# Altium PCB finger.PcbDoc
Units mm, origin at the board's own origin, x right, y up, seen from the top; angles counter-clockwise.
Board outline 21 x 34 mm, 2 copper layers (Top Layer, Bottom Layer); 35 components, 38 nets, 238 pads, 92 vias.
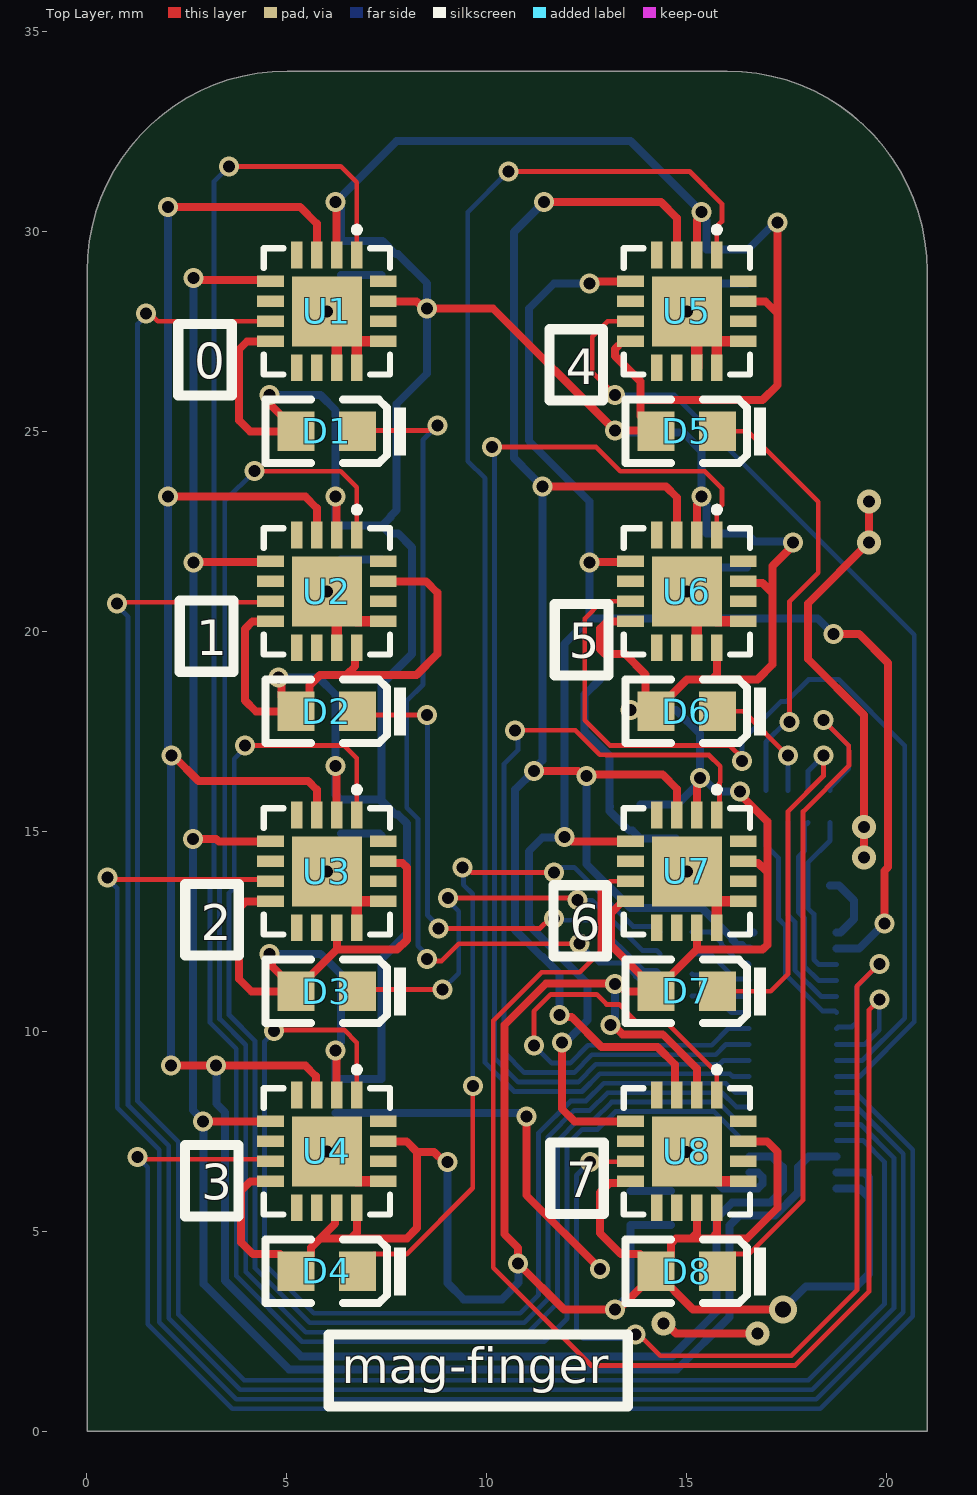
[diagram p0: Top Layer view]
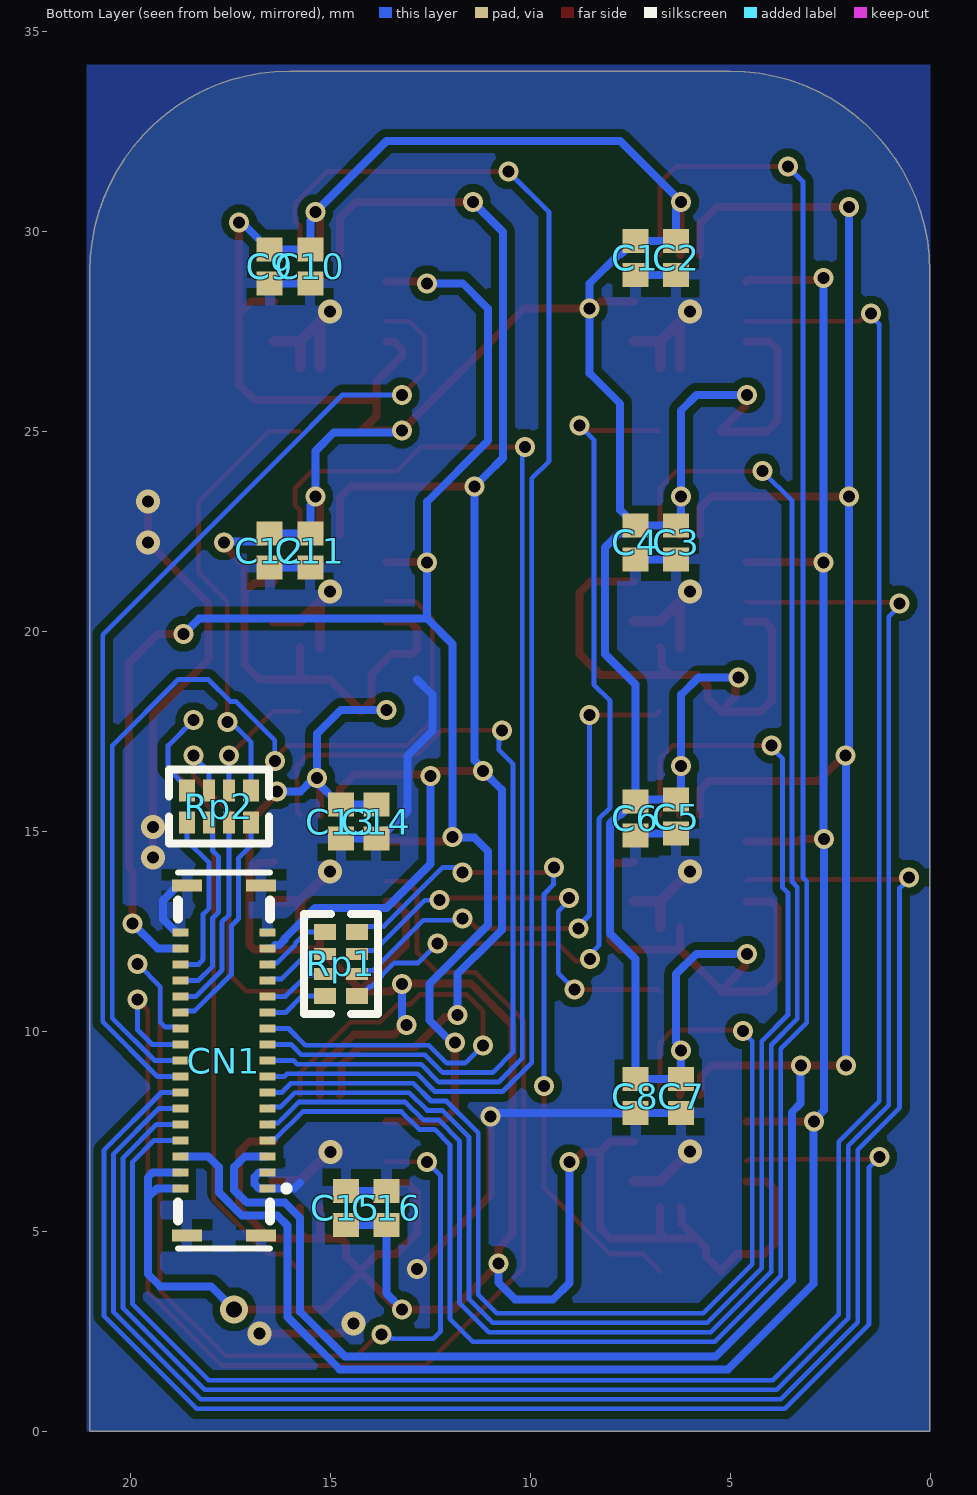
[diagram p1: Bottom Layer view, seen from below]
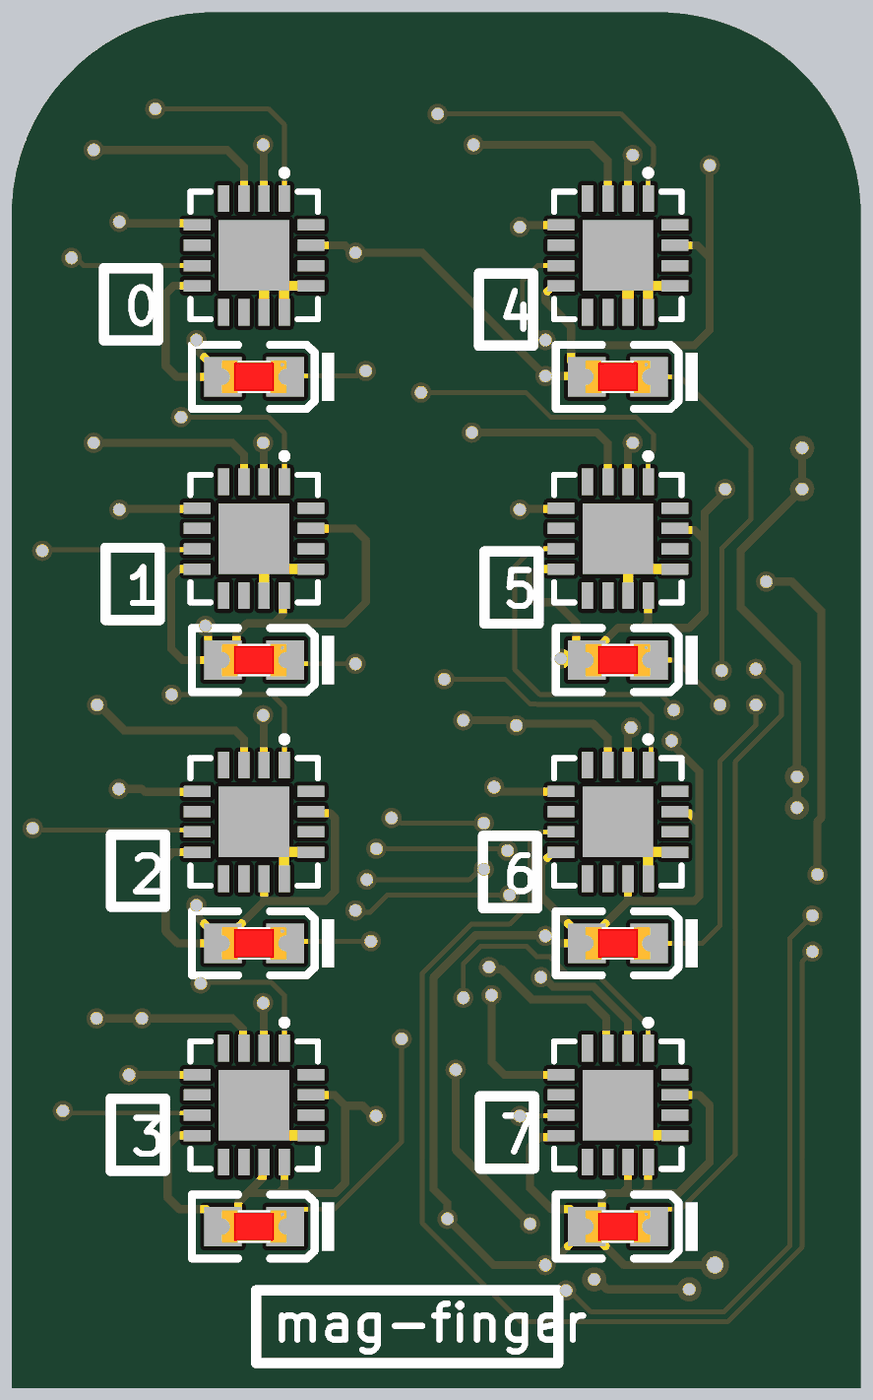
[diagram p2: 3D render of the assembled board from above, using the file's embedded part models]
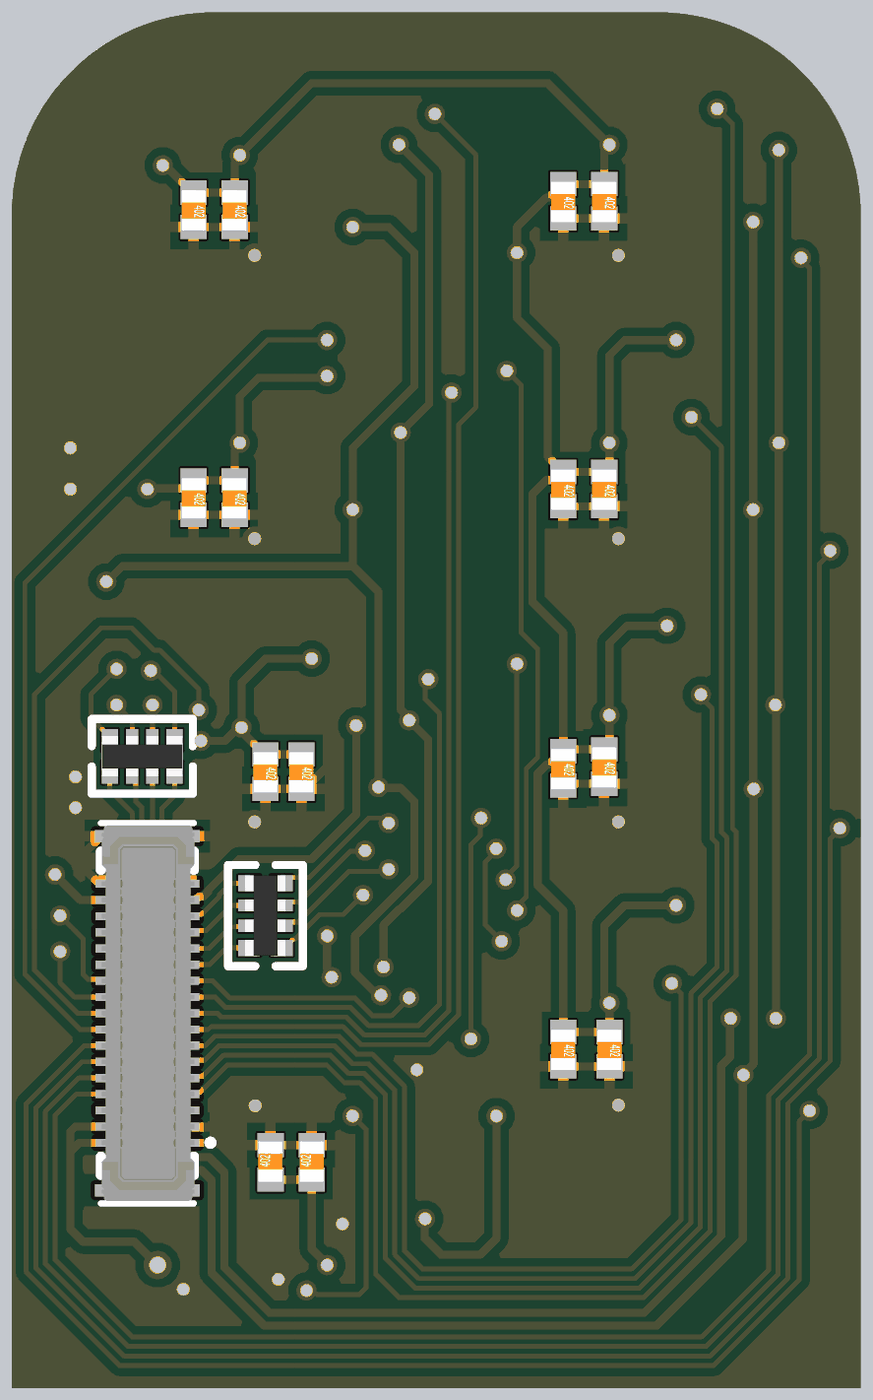
[diagram p3: 3D render of the assembled board from below, using the file's embedded part models]

## Layer stack, top to bottom
Top Solder: solder mask 0.0102, Solder Resist, Dk 3.5
Top Layer: signal copper 0.0356
Dielectric 1: dielectric 0.32, FR-4, Dk 4.8
Bottom Layer: signal copper 0.0356
Bottom Solder: solder mask 0.0102, Solder Resist, Dk 3.5

## Board outline
0.006,0.006 0.006,29.006 cw(c5.006,29.006) 5.006,34.006 16.006,34.006 cw(c16.006,29.006) 21.006,29.006 21.006,0.006

## Design rules (kind name [scope] priority, off if disabled: settings)
Clearance [All] p1: gap=0.2 ignorepadtopadclearanceinfootprint=TRUE except(0.117: Arc-Arc Arc-Track Arc-SMDPad Arc-THPad Arc-Text Arc-Hole Track-Track Track-SMDPad Track-THPad Track-Text Track-Hole SMDPad-SMDPad SMDPad-THPad SMDPad-Text SMDPad-Hole THPad-THPad THPad-Text THPad-Hole Fill-Text Fill-Hole Poly-Text Poly-Hole Region-Text Region-Hole Text-Text Text-Hole)
HoleSize [All] p1: absolutevalues=TRUE maxlimit=5 minlimit=0.025 maxpercent=80.000 minpercent=20.000
MinimumSolderMaskSliver [All] p1: minsoldermaskwidth=0
PolygonConnect [All] p1: thpad.connectstyle=Relief thpad.reliefconductorwidth=0.254 thpad.reliefentries=4 thpad.polygonreliefangle="90 Angle" thpad.airgapwidth=0.254 smdpad.connectstyle=Relief smdpad.reliefconductorwidth=0.254 smdpad.reliefentries=4 smdpad.polygonreliefangle="90 Angle" smdpad.airgapwidth=0.254 via.connectstyle=Direct via.reliefconductorwidth=0.254 via.reliefentries=4 via.polygonreliefangle="90 Angle" via.airgapwidth=0.254
RoutingVias [All] p1: holewidth=0.3 width=0.6 viastyle="Through Hole" minholewidth=0.3 minwidth=0.45 maxholewidth=0.3 maxwidth=0.5
SilkToSilkClearance [All] p1: silktosilkclearance=0
SilkToSolderMaskClearance [IsPad] p1: minsilkscreentomaskgap=0 clearancetoexposedcopper=TRUE
SolderMaskExpansion [All] p1: expansion=0.102 istentingtop=FALSE
Width [All] p1: maxlimit=0.5 minlimit=0.102 preferedwidth=0.2
26 further rules are at their usual default settings.

## Components (designator, comment, footprint, x,y, rotation, side; value= is the part's Value field where it differs from the comment)
C1 "100nF (104) 10% 16V" LC-0402_C_NOSILK 7.366,29.337 r270 bottom
C2 "100nF (104) 10% 16V" LC-0402_C_NOSILK 6.35,29.337 r270 bottom
C3 "100nF (104) 10% 16V" LC-0402_C_NOSILK 6.35,22.225 r270 bottom
C4 "100nF (104) 10% 16V" LC-0402_C_NOSILK 7.366,22.225 r270 bottom
C5 "100nF (104) 10% 16V" LC-0402_C_NOSILK 6.35,15.367 r270 bottom
C6 "100nF (104) 10% 16V" LC-0402_C_NOSILK 7.366,15.323 r270 bottom
C7 "100nF (104) 10% 16V" LC-0402_C_NOSILK 6.223,8.382 r270 bottom
C8 "100nF (104) 10% 16V" LC-0402_C_NOSILK 7.366,8.382 r270 bottom
C9 "100nF (104) 10% 16V" LC-0402_C_NOSILK 16.51,29.127 r270 bottom
C10 "100nF (104) 10% 16V" LC-0402_C_NOSILK 15.494,29.127 r270 bottom
C11 "100nF (104) 10% 16V" LC-0402_C_NOSILK 15.494,22.015 r270 bottom
C12 "100nF (104) 10% 16V" LC-0402_C_NOSILK 16.51,22.015 r270 bottom
C13 "100nF (104) 10% 16V" LC-0402_C_NOSILK 14.732,15.24 r270 bottom
C14 "100nF (104) 10% 16V" LC-0402_C_NOSILK 13.843,15.24 r270 bottom
C15 "100nF (104) 10% 16V" LC-0402_C_NOSILK 14.605,5.588 r90 bottom
C16 "100nF (104) 10% 16V" LC-0402_C_NOSILK 13.589,5.588 r90 bottom
CN1 "BM20B(0.8)-34DS-0.4V(51)" CONN-SMD_34P-P0.40_BM20B-0.8-34DS-0.4V-51 17.653,9.271 r90 bottom
D1 "白灯 0603" 0603_LED_S1 6,25 r180 top locked
D2 "白灯 0603" 0603_LED_S1 6,18 r180 top
D3 "白灯 0603" 0603_LED_S1 6,11 r180 top
D4 "白灯 0603" 0603_LED_S1 6,4 r180 top
D5 "白灯 0603" 0603_LED_S1 15,25 r180 top
D6 "白灯 0603" 0603_LED_S1 15,18 r180 top
D7 "白灯 0603" 0603_LED_S1 15,11 r180 top
D8 "白灯 0603" 0603_LED_S1 15,4 r180 top
Rp1 "33Ω (330) ±5%" 0402_Rx4 14.732,11.684 r90 bottom
Rp2 "33Ω (330) ±5%" 0402_Rx4 17.78,15.621 r0 bottom
U1 "MLX90393ELW-ABA-011-SP" QFN-16_L3.0-W3.0-P0.50-TR-EP1.7 6,28 r0 top locked
U2 "MLX90393ELW-ABA-011-SP" QFN-16_L3.0-W3.0-P0.50-TR-EP1.7 6,21 r0 top locked
U3 "MLX90393ELW-ABA-011-SP" QFN-16_L3.0-W3.0-P0.50-TR-EP1.7 6,14 r0 top locked
U4 "MLX90393ELW-ABA-011-SP" QFN-16_L3.0-W3.0-P0.50-TR-EP1.7 6,7 r0 top locked
U5 "MLX90393ELW-ABA-011-SP" QFN-16_L3.0-W3.0-P0.50-TR-EP1.7 15,28 r0 top locked
U6 "MLX90393ELW-ABA-011-SP" QFN-16_L3.0-W3.0-P0.50-TR-EP1.7 15,21 r0 top locked
U7 "MLX90393ELW-ABA-011-SP" QFN-16_L3.0-W3.0-P0.50-TR-EP1.7 15,14 r0 top locked
U8 "MLX90393ELW-ABA-011-SP" QFN-16_L3.0-W3.0-P0.50-TR-EP1.7 15,7 r0 top locked

## Footprints (in the part's own frame and the unit in brackets; to place one, negate y for a bottom-side part, rotate by r counter-clockwise, add the part's x,y. Pads: shape width x height; smd on the part's side, far side on the other; paste and mask are expansions set on the pad)
0402_Rx4 [mm]
  rect 0.4x0.55 smd mask+0.051: 1(-0.8,-0.4) 4(0.8,-0.4) 5(0.8,0.4) 8(-0.8,0.4)
  rect 0.3x0.55 smd mask+0.051: 2(-0.25,-0.4) 3(0.25,-0.4) 6(0.25,0.4) 7(-0.25,0.4)
  silkscreen extent -1.25,-0.93 1.25,0.92, body extent -1,-0.5 1,0.5, height 0.45
0603_LED_S1 [mm]
  rect 0.93x0.98 smd: A(0.77,0) K(-0.77,0)
  silkscreen extent -1.98,-0.79 1.54,0.79, body extent -0.8,-0.4 0.8,0.4, height 0.6
CONN-SMD_34P-P0.40_BM20B-0.8-34DS-0.4V-51 [mm]
  rect 0.2x0.4 smd: 1(-3.2,-1.09) 2(-3.2,1.09) 3(-2.8,-1.09) 4(-2.8,1.09) 5(-2.4,-1.09) 6(-2.4,1.09) 7(-2,-1.09) 8(-2,1.09) 9(-1.6,-1.09) 10(-1.6,1.09) 11(-1.2,-1.09) 12(-1.2,1.09) 13(-0.8,-1.09) 14(-0.8,1.09) 15(-0.4,-1.09) 16(-0.4,1.09) 17(0,-1.09) 18(0,1.09) 19(0.4,-1.09) 20(0.4,1.09) 21(0.8,-1.09) 22(0.8,1.09) 23(1.2,-1.09) 24(1.2,1.09) 25(1.6,-1.09) 26(1.6,1.09) 27(2,-1.09) 28(2,1.09) 29(2.4,-1.09) 30(2.4,1.09) 31(2.8,-1.09) 32(2.8,1.09) 33(3.2,-1.09) 34(3.2,1.09)
  rect 0.3x0.75 smd: 35(4.375,-0.925) 36(4.375,0.925) 37(-4.375,-0.925) 38(-4.375,0.925)
  silkscreen extent -4.7,-1.64 4.7,1.15, body extent -4.64,-1.17 4.64,1.13, height 0.77
LC-0402_C_NOSILK [mm]
  rect 0.6x0.65 smd mask+0.051: 1(-0.425,0) 2(0.425,0)
  body extent -0.48,-0.3 0.52,0.3, height 0.2
QFN-16_L3.0-W3.0-P0.50-TR-EP1.7 [mm]
  rect 0.28x0.665 smd: 1(0.75,1.407) 2(0.25,1.407) 3(-0.25,1.407) 4(-0.75,1.407) 9(-0.75,-1.407) 10(-0.25,-1.407) 11(0.25,-1.407) 12(0.75,-1.407)
  rect 0.665x0.28 smd: 5(-1.407,0.75) 6(-1.407,0.25) 7(-1.407,-0.25) 8(-1.407,-0.75) 13(1.407,-0.75) 14(1.407,-0.25) 15(1.407,0.25) 16(1.407,0.75)
  rect 1.75x1.75 smd: 17(0,0)
  silkscreen extent -1.58,-1.58 1.58,2.11, body extent -1.5,-1.5 1.5,1.5

## Part data
C1 C2 C3 C4 C5 C6 C7 C8 C9 C10 C11 C12 C13 C14 C15 C16: library part "0402 100nF (104) 10% 16V", "贴片电容", Package=0402, SuppliersPartNumber=C1525, ComponentLink1Description=供应商链接, ComponentLink1URL=http://www.szlcsc.com/product/details_1877.html, Supplier=LC
CN1: "0.4mm BTB连接器-34P 母", BOM_JLCPCB Part Class="Extended Part", BOM_Manufacturer=HRS(广濑), BOM_Manufacturer Part=BM20B(0.8)-34DS-0.4V(51), BOM_Supplier=LCSC, BOM_Supplier Part=C424541, Contributor=LCSC, spicePre=C, spiceSymbolName=BM20B(0.8)-34DS-0.4V(51)
D1 D2 D3 D4 D5 D6 D7 D8: library part "0603 白灯", "发光二极管", Package=0603, SuppliersPartNumber=C2290, ComponentLink1Description=供应商链接, ComponentLink1URL=http://www.szlcsc.com/product/details_2663.html, Supplier=LC
Rp1 Rp2: library part "0402*4 33Ω (330) 5%", "贴片排阻", Package=0402*4, SuppliersPartNumber=C25501, ComponentLink1Description=供应商链接, ComponentLink1URL=http://www.szlcsc.com/product/details_26244.html, Supplier=LC
U1 U2 U3 U4 U5 U6 U7 U8: BOM_JLCPCB Part Class="Extended Part", BOM_Manufacturer=Melexis(比利时迈来芯), BOM_Manufacturer Part=MLX90393ELW-ABA-011-SP, BOM_Supplier=LCSC, BOM_Supplier Part=C1526586, Contributor=LCSC, spicePre=U, spiceSymbolName=MLX90393ELW-ABA-011-SP

## Via types
v1: diameter 0.5, hole 0.3, Top Layer to Bottom Layer, tented both sides, 77 vias
v2: diameter 0.6, hole 0.3, Top Layer to Bottom Layer, tented both sides, 14 vias
v3: diameter 0.7, hole 0.4, Top Layer to Bottom Layer, tented both sides, 1 vias

## Nets (pads, with @x,y where several pads share a name; then routed paths per layer and width w, separated by ;. In a path a pad name is that pad's centre, name@x,y a point inside that pad or via, vN(x,y) a via of type N, cw(c..) or ccw(c..) an arc to the next point about the centre after c; other vN are vias at no path point)
GND: C1.2 C2.2 C3.2 C4.2 C5.2 C6.2 C7.2 C8.2 C9.2 C10.2 C11.2 C12.2 C13.2 C14.2 C15.2 C16.2 CN1.1 CN1.3 CN1.33 CN1.34 CN1.35 CN1.36 CN1.37 CN1.38 U1.11 U1.12 U1.13 U1.17 U2.11 U2.13 U2.17 U3.12 U3.13 U3.17 U4.13 U4.17 U5.11 U5.12 U5.13 U5.17 U6.11 U6.13 U6.17 U7.12 U7.13 U7.17 U8.13 U8.17 | length 58.4
  Top Layer w0.2: v1(10.987,7.874) 10.987,5.904 v1(12.827,4.064) ; v2(14.414,2.693) 14.486,2.693 14.731,2.448 v2(16.764,2.448) ; v2(19.431,14.351) v2(19.431,15.113) 19.431,17.907 18.034,19.304 18.034,20.701 v2(19.558,22.225) v2(19.558,23.241)
  Top Layer w0.254: v2(6,7) 6.748,6.252 U4.13 U4.13 ; v2(6,14) U3.17@6.748,13.252 ; v2(6,21) U2.17@6.25,20.75 ; v2(6,28) U1.17@6.25,27.75 ; U2.11 U2.17@6.25,20.75 ; U1.11 U1.17@6.25,27.75 ; U3.12 U3.12 U3.17@6.748,13.252 ; U1.12 6.748,26.595 U1.17@6.748,27.252 ; U3.13 U3.13 U3.17@6.748,13.252 ; U2.13 7.405,20.252 6.748,20.252 U2.17@6.25,20.75 ; U1.13 7.405,27.252 U1.17@6.748,27.252 ; U8.17 15.748,6.252 16.405,6.252 U8.13 ; v2(15,14) U7.17@15.748,13.252 ; v2(15,21) U6.17@15.25,20.75 ; v2(15,28) 15.25,27.75 U5.17@15.748,27.252 ; U6.11 U6.17@15.25,20.75 ; U7.12 15.748,12.595 U7.17@15.748,13.252 ; U5.12 15.748,26.595 U5.17@15.748,27.252 ; U7.13 16.405,13.252 U7.17@15.748,13.252 ; U6.13 16.405,20.252 15.748,20.252 U6.17@15.25,20.75 ; U5.13 16.405,27.252 U5.17@15.748,27.252 ; U1.17@6.25,27.75 U1.17@6.748,27.252
  Top Layer w0.28: U5.11 U5.17@15.25,27.75
  Bottom Layer w0.2: C7.2 C8.2 10.839,7.957 10.922,7.874 v1(10.987,7.874) ; C5.2 7.322,14.942 C6.2 ; C3.2 C4.2 ; C2.2 C1.2 ; 12.827,18.796 12.446,18.415 12.446,17.51 13.068,16.888 13.068,15.634 13.081,15.621 ; 13.068,15.621 13.068,15.508 13.561,15.015 13.643,15.015 C14.2 C13.2 ; C16.2 C15.2 ; C11.2 C12.2 ; C10.2 C9.2 ; 15.748,6.223 15.9,6.071 16.774,6.071 16.891,6.188 16.891,6.354 16.774,6.471 CN1.3 ; CN1.33 CN1.33@16.663,12.471 ; CN1.36 18.803,13.646 19.177,13.272 19.177,12.805 18.843,12.471 CN1.34
  other v2: 14.986,6.985
I2C0_SCL: CN1.5 U1.3 U2.3 U3.3 U4.3 | length 64.3
  Top Layer w0.2: v1(2.032,23.368) 5.461,23.368 5.75,23.079 U2.3 ; v1(2.032,30.607) 5.334,30.607 5.75,30.191 U1.3 ; v1(2.103,9.144) 5.461,9.144 5.725,8.88 5.725,8.432 U4.3 ; v1(2.117,16.891) 2.159,16.891 2.794,16.256 5.534,16.256 5.75,16.04 U3.3
  Bottom Layer w0.2: v1@2.032,30.591 v1(2.032,23.368) 2.032,17.099 2.06,17.072 2.06,16.948 v1(2.117,16.891) ; v1(2.103,9.144) 2.103,16.835 v1@2.138,16.87 ; v1(3.224,9.144) 3.238,9.13 3.238,8.194 3.457,7.975 3.457,3.771 5.359,1.869 14.629,1.869 15.748,2.988 15.748,5.334 16.129,5.715 17.078,5.715 17.399,6.036 17.399,6.604 17.132,6.871 CN1.5
I2C0_SDA: CN1.6 U1.5 U2.5 U3.5 U4.5 | length 53.4
  Top Layer w0.2: v1(2.653,14.813) 3.231,14.813 3.303,14.741 4.584,14.741 U3.5 ; v1(2.667,21.717) 2.684,21.734 4.576,21.734 U2.5 ; v1(2.667,28.829) 2.706,28.79 4.553,28.79 U1.5 ; v1(2.907,7.747) 2.909,7.749 4.591,7.749 U4.5
  Bottom Layer w0.2: v1(2.653,14.813) 2.653,8.029 v1@2.921,7.761 ; v1@2.667,14.813 v1(2.667,21.717) v1(2.667,28.829) ; v1@2.921,7.747 2.921,3.683 5.052,1.552 14.76,1.552 16.065,2.857 16.065,5.143 16.32,5.398 17.209,5.398 17.78,5.969 17.78,6.604 18.047,6.871 CN1.6
I2C1_SCL: CN1.31 U5.3 U6.3 U7.3 U8.3 | length 46.3
  Top Layer w0.2: v1(11.176,16.51) 12.28,16.51 12.407,16.383 12.449,16.425 14.388,16.425 14.75,16.063 U7.3 ; v1(11.388,23.622) 14.478,23.622 14.75,23.35 U6.3 ; v1(11.43,30.734) 14.351,30.734 14.75,30.335 U5.3 ; v1(11.811,10.414) 11.868,10.357 12.122,10.357 12.869,9.61 14.266,9.61 14.71,9.166 14.71,8.447 U8.3
  Bottom Layer w0.2: v1(11.43,30.734) 10.68,29.984 10.68,24.33 11.119,23.891 v1(11.388,23.622) 11.388,16.777 11.176,16.565 v1(11.176,16.51) 10.708,16.042 10.708,12.533 11.388,11.853 11.404,11.853 11.811,11.446 v1(11.811,10.414) ; v1(12.488,16.383) 12.488,14.182 13.589,13.081 15.382,13.081 16.146,12.317 16.146,12.281 16.273,12.154 16.38,12.154 16.463,12.071 CN1.31
I2C1_SDA: CN1.32 U5.5 U6.5 U7.5 U8.5 | length 45.8
  Top Layer w0.2: v1(11.873,9.717) 11.873,8.066 12.189,7.75 U8.5 ; v1(11.938,14.859) 12.019,14.859 12.128,14.75 U7.5 ; v1(12.573,21.717) 12.59,21.734 13.576,21.734 U6.5 ; v1(12.573,28.702) 12.621,28.75 U5.5 ; v1(18.669,19.939) 19.304,19.939 20.031,19.212 20.031,14.102 19.937,14.008 v1(19.937,12.7)
  Bottom Layer w0.2: v1(11.873,9.717) 11.955,9.717 12.516,10.278 12.516,11.189 11.049,12.656 11.049,14.502 11.388,14.841 v1@11.92,14.841 ; v1(11.938,14.859) 11.938,19.685 12.573,20.32 ; v1(12.573,28.702) 11.684,28.702 11.049,28.067 11.049,24.765 12.573,23.241 12.573,20.32 ; v1(18.669,19.939) 18.653,19.939 18.272,20.32 12.573,20.32 ; CN1.32 19.31,12.071 19.937,12.698 v1(19.937,12.7)
LED_P0: CN1.23 Rp1.8 | length 1.6
  Bottom Layer w0.12: Rp1.8 15.699,10.884 16.112,10.471 CN1.23
LED_P1: CN1.25 Rp1.7 | length 1.7
  Bottom Layer w0.12: Rp1.7 15.161,11.405 15.587,11.405 16.122,10.871 CN1.25
LED_P2: CN1.27 Rp1.6 | length 1.7
  Bottom Layer w0.12: Rp1.6 15.587,11.934 16.21,11.311 16.523,11.311 CN1.27
LED_P3: CN1.29 Rp1.5 | length 1.8
  Bottom Layer w0.12: Rp1.5 15.587,12.484 15.869,12.202 15.869,12.166 16.325,11.711 16.523,11.711 CN1.29
LED_P4: CN1.24 Rp2.8 | length 5.7
  Bottom Layer w0.12: Rp2.8 16.98,14.643 17.293,14.33 17.293,12.808 17.465,12.636 17.465,11.432 18.386,10.511 18.703,10.511 CN1.24
LED_P5: CN1.26 Rp2.7 | length 5.1
  Bottom Layer w0.12: Rp2.7 17.53,12.907 17.702,12.734 17.702,11.53 18.361,10.871 CN1.26
LED_P6: CN1.28 Rp2.6 | length 4.7
  Bottom Layer w0.12: Rp2.6 17.94,15.131 17.94,14.511 17.789,14.36 17.789,12.983 17.939,12.833 17.939,11.628 18.296,11.271 CN1.28
LED_P7: CN1.30 Rp2.5 | length 4.3
  Bottom Layer w0.12: Rp2.5 18.58,14.77 18.026,14.216 18.026,13.081 18.176,12.931 18.176,11.796 18.301,11.671 CN1.30
MAG0_INT: CN1.7 U1.1 | length 52.1
  Top Layer w0.12: v1(3.556,31.623) 6.35,31.623 6.75,31.223 U1.1
  Bottom Layer w0.12: v1(3.556,31.623) 3.177,31.244 3.177,13.845 3.082,13.75 3.082,10.212 3.734,9.56 3.734,3.886 5.38,2.24 11.43,2.24 12.005,2.815 12.005,7.165 12.388,7.548 12.772,7.548 13.217,7.993 15.683,7.993 16.365,7.311 16.523,7.311 CN1.7
MAG0_TRIG: CN1.8 U1.7 | length 52.8
  Top Layer w0.12: v1(1.482,27.94) 1.585,27.94 1.775,27.75 U1.7
  Bottom Layer w0.12: v1(1.482,27.94) 1.482,27.892 1.27,27.68 1.27,8.255 2.284,7.241 2.284,2.923 3.932,1.275 18.039,1.275 19.939,3.175 19.939,6.741 19.41,7.271 CN1.8
MAG1_INT: CN1.9 U2.1 | length 42.8
  Top Layer w0.12: v1(4.193,24.003) 6.35,24.003 6.75,23.603 U2.1
  Bottom Layer w0.12: v1(4.193,24.003) 3.45,23.26 3.45,13.737 3.319,13.606 3.319,10.31 3.971,9.658 3.971,3.984 5.478,2.477 11.032,2.477 11.768,3.213 11.768,7.263 12.289,7.785 12.53,7.785 12.674,7.785 13.119,8.23 13.483,8.23 15.781,8.23 16.301,7.711 16.523,7.711 CN1.9
MAG1_TRIG: CN1.10 U2.7 | length 47.5
  Top Layer w0.12: v1(0.76,20.701) 0.784,20.725 4.568,20.725 U2.7
  Bottom Layer w0.12: v1(0.76,20.701) 0.76,20.639 1.033,20.366 1.033,8.151 2.047,7.137 2.047,2.825 3.35,1.522 3.834,1.038 18.137,1.038 18.621,1.522 20.176,3.077 20.176,6.84 19.345,7.671 CN1.10
MAG2_INT: CN1.11 U3.1 | length 35.7
  Top Layer w0.12: v1(3.96,17.145) 6.436,17.145 6.75,16.831 U3.1
  Bottom Layer w0.12: v1(3.96,17.145) 3.96,17.083 3.687,16.81 3.687,13.593 3.556,13.462 3.556,10.409 4.208,9.757 4.208,4.082 5.576,2.714 10.934,2.714 11.531,3.311 11.531,7.361 12.191,8.022 12.431,8.022 12.576,8.022 13.021,8.467 13.385,8.467 15.88,8.467 16.236,8.111 16.523,8.111 CN1.11
MAG2_TRIG: CN1.12 U3.7 | length 42.2
  Top Layer w0.12: v1(0.523,13.843) 0.57,13.796 4.546,13.796 U3.7
  Bottom Layer w0.12: v1(0.523,13.843) 0.523,13.822 0.762,13.583 0.762,8.087 1.81,7.039 1.81,2.727 3.252,1.285 3.736,0.801 18.235,0.801 18.719,1.285 20.413,2.979 20.413,6.938 19.28,8.071 CN1.12
MAG3_INT: CN1.13 U4.1 | length 26.9
  Top Layer w0.12: v1(4.678,10.008) 4.706,10.035 6.434,10.035 6.75,9.719 U4.1
  Bottom Layer w0.12: v1(4.678,10.008) 4.678,9.981 4.445,9.747 4.445,4.181 5.674,2.951 10.836,2.951 11.294,3.409 11.294,7.459 12.093,8.259 12.333,8.259 12.477,8.259 12.923,8.704 13.286,8.704 15.978,8.704 16.211,8.471 CN1.13
MAG3_TRIG: CN1.14 U4.7 | length 35.3
  Top Layer w0.12: v1(1.27,6.858) 1.324,6.804 4.539,6.804 U4.7
  Bottom Layer w0.12: v1(1.27,6.858) 1.524,6.603 1.524,2.677 3.187,1.014 3.637,0.564 18.334,0.564 18.784,1.014 20.65,2.88 20.65,7.036 19.215,8.471 CN1.14
MAG4_INT: CN1.15 U5.1 | length 37
  Top Layer w0.12: v1(10.541,31.496) 15.072,31.496 15.877,30.691 15.877,30.249 15.75,30.122 U5.1
  Bottom Layer w0.12: v1(10.541,31.496) 9.525,30.48 9.525,24.257 9.957,23.825 9.957,9.22 10.681,8.496 12.379,8.496 12.824,8.941 16.076,8.941 16.146,8.871 CN1.15
MAG4_TRIG: CN1.16 U5.7 | length 25
  Top Layer w0.12: v1(13.208,25.908) 12.637,26.479 12.637,27.369 13.018,27.75 U5.7
  Bottom Layer w0.12: v1(13.208,25.908) 14.691,25.908 16.275,24.324 20.684,19.915 20.684,10.235 19.32,8.871 CN1.16
MAG5_INT: CN1.17 U6.1 | length 29.5
  Top Layer w0.12: v1(10.13,24.61) 12.728,24.61 13.335,24.003 15.453,24.003 15.877,23.579 15.877,23.157 15.75,23.03 U6.1
  Bottom Layer w0.12: v1(10.13,24.61) 10.194,24.547 10.194,9.329 10.79,8.733 12.281,8.733 12.726,9.178 15.817,9.178 15.91,9.271 CN1.17
MAG5_TRIG: CN1.18 U6.7 | length 23.1
  Top Layer w0.12: U6.7 12.876,20.75 12.446,20.32 12.446,17.78 13.081,17.145 16.074,17.145 16.383,16.836 v1(16.383,16.764)
  Bottom Layer w0.12: v1(16.383,16.764) 16.383,17.272 17.358,18.247 17.496,18.247 18.045,18.796 18.796,18.796 20.447,17.145 20.447,10.333 19.385,9.271 CN1.18
MAG6_INT: CN1.19 U7.1 | length 21.6
  Top Layer w0.12: v1(10.704,17.526) 12.215,17.526 12.827,16.914 12.977,16.914 12.983,16.908 15.554,16.908 15.834,16.628 15.834,16.227 15.82,16.213 15.82,15.477 U7.1
  Bottom Layer w0.12: v1(10.704,17.526) 10.777,17.453 10.777,17.161 10.782,17.156 10.782,17.036 10.431,16.685 10.431,9.478 10.939,8.97 12.183,8.97 12.628,9.415 15.719,9.415 15.975,9.671 CN1.19
MAG6_TRIG: CN1.20 U7.7 | length 32.5
  Top Layer w0.12: U7.7 13.081,13.75 12.827,13.496 12.827,11.981 12.324,11.478 11.37,11.478 10.16,10.268 10.16,4.093 12.604,1.649 17.71,1.649 19.558,3.497 19.558,10.54 v1(19.812,10.795)
  Bottom Layer w0.12: CN1.20 19.45,9.671 19.812,10.033 v1(19.812,10.795)
MAG7_INT: CN1.21 U8.1 | length 12.9
  Top Layer w0.12: v1(11.176,9.652) 11.176,10.5 11.6,10.924 12.743,10.924 12.995,10.672 13.306,10.672 13.753,10.225 14.491,10.225 15.75,8.966 U8.1
  Bottom Layer w0.12: v1(11.176,9.652) 11.621,9.207 12.085,9.207 12.53,9.652 15.621,9.652 16.04,10.071 CN1.21
MAG7_TRIG: CN1.22 U8.7 | length 24
  Top Layer w0.12: v1(12.575,6.731) 12.584,6.74 13.583,6.74 U8.7 ; v1@13.762,2.465 14.338,1.888 17.614,1.888 19.253,3.527 19.253,11.125 v1(19.812,11.684)
  Bottom Layer w0.12: v1(12.575,6.731) 12.242,6.398 12.242,2.49 12.416,2.316 13.456,2.316 13.486,2.346 13.643,2.346 v1(13.716,2.419) ; CN1.22 18.783,10.111 19.128,10.111 19.244,10.227 19.244,11.116 v1(19.812,11.684)
NetD1_K: D1.K Rp1.1 | length 22.5
  Top Layer w0.12: D1.K 6.789,25.019 8.533,25.019 8.66,25.146 v1(8.763,25.146) ; v1(8.507,11.811) 8.556,11.762 8.869,11.762 9.299,12.192 v1(12.317,12.192)
  Bottom Layer w0.12: v1(8.507,11.811) 8.507,11.914 8.278,12.143 8.278,15.31 7.999,15.589 7.999,18.264 8.405,18.67 8.405,24.788 v1(8.763,25.146) ; v1(12.317,12.192) 12.319,12.192 12.8,11.711 13.398,11.711 13.718,11.391 13.718,11.373 13.984,11.107 14.034,11.107 14.257,10.884 Rp1.1
NetD2_K: D2.K Rp1.2 | length 13.5
  Top Layer w0.12: D2.K 6.863,17.907 v1(8.509,17.907) ; v1(8.788,12.573) 11.33,12.573 11.584,12.827 v1(11.684,12.827)
  Bottom Layer w0.12: v1(8.509,17.907) 8.515,17.901 8.515,12.908 8.788,12.635 v1(8.788,12.573) ; v1(11.684,12.827) 11.732,12.779 12.666,12.779 13.92,11.524 14.242,11.524 Rp1.2
NetD3_K: D3.K Rp1.3 | length 10.6
  Top Layer w0.12: D3.K 6.819,11.049 v1(8.89,11.049) ; v1(9.025,13.337) 12.22,13.337 v1(12.269,13.289)
  Bottom Layer w0.12: v1(8.89,11.049) 9.298,11.457 9.298,13.002 9.025,13.275 v1(9.025,13.337) ; v1(12.269,13.289) 12.278,13.279 12.629,13.279 13.884,12.024 14.242,12.024 Rp1.3
NetD4_K: D4.K Rp1.4 | length 17.6
  Top Layer w0.12: D4.K 6.77,4.025 7.175,4.43 7.997,4.43 9.65,6.083 v1(9.65,8.636) ; v1(9.398,14.097) 9.501,14.097 9.628,13.97 v1(11.684,13.97)
  Bottom Layer w0.12: v1(9.398,14.097) 9.416,14.079 9.416,13.667 9.65,13.433 v1(9.65,8.636) ; v1(11.684,13.97) 11.811,14.097 12.181,14.097 13.654,12.624 14.192,12.624 Rp1.4
NetD5_K: D5.K Rp2.1 | length 11.1
  Top Layer w0.12: D5.K 16.529,25 18.288,23.241 18.288,21.469 17.569,20.75 v1(17.569,17.737)
  Bottom Layer w0.12: Rp2.1 16.98,17.234 17.483,17.737 v1(17.569,17.737)
NetD6_K: D6.K Rp2.2 | length 3.1
  Top Layer w0.12: D6.K 16.417,18 v1(17.526,16.891)
  Bottom Layer w0.12: v1(17.526,16.891) 17.528,16.889 17.528,16.023 Rp2.2
NetD7_K: D7.K Rp2.3 | length 8.8
  Top Layer w0.12: D7.K 17.096,11 17.526,11.43 17.526,15.494 18.415,16.383 v1(18.415,16.891)
  Bottom Layer w0.12: Rp2.3 18.03,16.506 v1(18.415,16.891)
NetD8_K: D8.K Rp2.4 | length 17.8
  Top Layer w0.12: D8.K 15.77,4.025 16.175,4.43 16.552,4.43 17.907,5.785 17.907,15.493 19.052,16.638 19.052,17.016 19.05,17.018 19.05,17.145 v1(18.415,17.78)
  Bottom Layer w0.12: v1(18.415,17.78) 19.05,17.145 19.05,16.566 18.58,16.096 Rp2.4
VCC_3V3: C1.1 C2.1 C3.1 C4.1 C5.1 C6.1 C7.1 C8.1 C9.1 C10.1 C11.1 C12.1 C13.1 C14.1 C15.1 C16.1 CN1.2 CN1.4 D1.A D2.A D3.A D4.A D5.A D6.A D7.A D8.A U1.2 U1.8 U1.15 U2.2 U2.8 U2.12 U2.15 U3.2 U3.8 U3.11 U3.15 U4.2 U4.8 U4.11 U4.12 U4.15 U5.2 U5.8 U5.15 U6.2 U6.8 U6.12 U6.15 U7.2 U7.8 U7.11 U7.15 U8.2 U8.8 U8.11 U8.12 U8.15 | length 211.9
  Top Layer w0.2: v1(4.572,11.938) 4.629,11.881 4.629,11.626 4.865,11.39 4.865,11.365 D3.A 4.113,11 3.81,11.303 3.81,13.081 3.979,13.25 U3.8 ; U4.8 4.091,6.25 3.86,6.019 3.86,4.72 4.149,4.43 4.825,4.43 5.23,4.025 D4.A 5.608,4.378 5.608,4.592 5.842,4.826 ; U2.8 4.14,20.25 3.951,20.061 3.951,18.274 4.225,18 D2.A ; U1.8 4.009,27.25 3.81,27.051 3.81,25.273 4.083,25 D1.A 5.23,25.025 4.629,25.626 ; v1(4.796,18.844) 4.796,18.763 4.865,18.694 4.865,18.365 D2.A ; D3.A@5.23,11.025 6.25,12.045 ; v1(6.223,9.525) 6.237,9.511 6.237,8.421 U4.2 ; v1(6.223,16.635) 6.237,16.621 6.237,15.421 U3.2 ; v1(6.223,23.368) 6.237,23.354 6.237,22.421 U2.2 ; v1(6.223,30.734) 6.237,30.72 6.237,29.421 U1.2 ; U4.11 6.21,5.553 6.21,5.194 5.842,4.826 ; U3.11 6.25,12.045 ; U4.12 6.75,4.972 6.604,4.826 ; U2.12 6.71,19.553 6.71,19.128 6.49,18.908 ; U4.15 7.99,7.25 8.255,6.985 ; U3.15 7.447,14.21 7.888,14.21 8.001,14.097 8.001,12.287 7.757,12.043 6.52,12.043 6.518,12.045 6.25,12.045 ; U2.15 8.478,21.25 8.763,20.965 8.763,19.431 8.24,18.908 6.49,18.908 ; U1.15 8.245,28.25 8.428,28.067 v1(8.509,28.067) 10.16,28.067 v1(13.208,25.019) D5.A@14.211,25.019 ; v1(9.017,6.731) 8.936,6.731 8.682,6.985 8.255,6.985 ; v1(13.095,10.162) 13.16,10.162 13.395,9.927 14.397,9.927 15.25,9.074 U8.2 ; v1(13.208,3.048) 11.927,3.048 v1(10.784,4.191) 10.784,4.583 10.437,4.93 10.437,10.153 11.485,11.201 13.187,11.201 13.208,11.18 13.285,11.18 13.465,11 D7.A D7.A@14.23,11.025 ; v1@13.256,3.001 D8.A@14.23,3.975 ; v1(13.589,18.034) D6.A@14.196,18.034 ; U8.8 13.553,6.21 13.068,6.21 12.827,5.969 12.827,4.953 13.35,4.43 13.825,4.43 14.23,4.025 D8.A ; U7.8 13.4,13.25 13.104,12.954 13.104,12.151 D7.A@14.23,11.025 ; U6.8 13.011,20.25 12.827,20.066 12.827,19.558 12.954,19.431 13.462,19.431 13.97,18.923 13.97,18.26 D6.A@14.196,18.034 ; U5.8 13.4,27.25 13.208,27.058 13.208,26.883 13.843,26.248 13.843,25.781 ; D6.A D6.A@14.196,18.034 ; D6.A@14.23,18.025 15.001,18.796 15.621,18.796 ; D5.A D5.A@14.211,25.019 ; U8.11 15.25,4.963 15.113,4.826 ; U7.11 15.25,12.045 ; U7.2 v1@15.25,16.129 ; U6.2 v1@15.25,23.17 ; U5.2 v1@15.25,30.282 ; U8.12 15.75,4.955 15.621,4.826 ; U6.12 15.75,18.925 15.621,18.796 ; v1(16.33,16.002) 16.383,15.949 16.383,15.875 17.011,15.247 17.011,13.977 ; U8.15 17.007,7.25 17.272,6.985 17.272,5.588 16.51,4.826 15.621,4.826 ; U7.15 16.447,14.21 16.778,14.21 17.011,13.977 ; U6.15 16.447,21.21 16.89,21.21 17.145,20.955 ; U5.15 16.962,28.25 17.272,27.94 ; v1(17.272,30.226) 17.272,27.94 ; v3(17.399,3.048) 15.157,3.048 D8.A@14.23,3.975 ; v1(17.653,22.225) 17.653,22.144 17.145,21.636 17.145,20.955 ; D2.A 5.564,18.334 5.564,18.645 5.827,18.908 6.49,18.908 ; 5.842,4.826 6.604,4.826 ; 6.604,4.826 8.001,4.826 8.255,5.08 8.255,6.985 ; 13.843,25.781 16.891,25.781 17.272,26.162 17.272,27.94 ; 13.843,25.781 13.843,25.387 D5.A@14.211,25.019 ; D8.A@14.23,3.975 D8.A ; D8.A 14.605,4.375 14.605,4.699 14.732,4.826 15.113,4.826 ; D7.A@14.23,11.025 15.25,12.045 ; 15.113,4.826 15.621,4.826 ; 15.25,12.045 15.518,12.045 15.52,12.043 16.894,12.043 17.011,12.16 17.011,13.977 ; 15.621,18.796 16.764,18.796 17.145,19.177 17.145,20.955
  Bottom Layer w0.2: v1(4.572,11.938) 5.842,11.938 6.35,11.43 6.35,9.733 6.223,9.606 C7.1 C8.1 7.366,11.811 8.001,12.446 8.001,15.195 7.781,15.415 7.724,15.415 7.391,15.748 C6.1 ; v1(4.572,25.908) 5.842,25.908 6.223,25.527 v1(6.223,23.368) 6.223,22.777 C3.1 C4.1 ; v1(4.796,18.844) 5.794,18.844 6.223,18.415 6.223,15.919 C5.1 7.322,15.792 C6.1 ; v1(6.223,30.734) 7.747,32.258 13.589,32.258 v1(15.367,30.48) 15.367,30.399 15.494,30.272 C10.1 C9.1 16.535,29.552 17.209,30.226 v1(17.272,30.226) ; v1@6.35,30.607 C2.1 C1.1 7.391,29.762 7.724,29.429 7.781,29.429 8.509,28.701 v1(8.509,28.067) 8.509,26.45 7.747,25.688 7.747,23.031 7.591,22.875 7.591,22.85 7.391,22.65 C4.1 ; v1(9.017,6.731) 9.017,3.708 9.423,3.302 10.377,3.302 10.795,3.72 10.795,4.18 v1(10.784,4.191) ; v1(13.095,10.162) 13.095,10.243 13.208,10.356 13.208,11.18 v1(13.206,11.182) ; v1(13.208,3.048) 13.208,3.064 13.589,3.445 C16.1 C15.1 ; v1(13.208,25.019) 13.25,24.977 14.901,24.977 15.367,24.511 v1(15.367,23.368) 15.367,23.287 15.494,23.16 C11.1 C12.1 16.71,22.24 17.638,22.24 v1(17.653,22.225) ; v1(13.589,18.034) 14.732,18.034 15.324,17.442 v1(15.324,16.332) ; C14.1 14.757,15.665 v1@15.363,16.271 ; v1@15.463,16.275 15.736,16.002 v1(16.33,16.002) ; v3(17.399,3.048) 17.977,3.626 19.247,3.626 19.558,3.937 19.558,5.842 ; CN1.2 19.329,6.071 19.558,5.842 ; CN1.4 19.437,6.471 19.558,6.35 19.558,5.842 ; C6.1 7.366,18.669 8.128,19.431 8.128,22.098 7.776,22.45 7.566,22.45 C4.1
pads on no net: U1.4 U1.6 U1.9 U1.10 U1.14 U1.16 U2.4 U2.6 U2.9 U2.10 U2.14 U2.16 U3.4 U3.6 U3.9 U3.10 U3.14 U3.16 U4.4 U4.6 U4.9 U4.10 U4.14 U4.16 U5.4 U5.6 U5.9 U5.10 U5.14 U5.16 U6.4 U6.6 U6.9 U6.10 U6.14 U6.16 U7.4 U7.6 U7.9 U7.10 U7.14 U7.16 U8.4 U8.6 U8.9 U8.10 U8.14 U8.16

## Polygon pours and split planes (outlines as drawn)
GND on Bottom Layer "GND_L02_P000" (solid, remove dead copper, pour order 0): 0,34.163 0,0 21.082,0 21.082,34.163

## Silkscreen, mask and mechanical layers (free items; w line width, h text height)
Top Overlay:
  lines w0.254: 2.286,25.9 3.625,25.9 3.625,27.686 2.286,27.686 2.286,25.9 ; 2.325,18.989 3.664,18.989 3.664,20.775 2.325,20.775 2.325,18.989 ; 2.455,5.375 3.794,5.375 3.794,7.161 2.455,7.161 2.455,5.375 ; 2.461,11.9 3.8,11.9 3.8,13.686 2.461,13.686 2.461,11.9 ; 6.05,0.625 13.525,0.625 13.525,2.425 6.05,2.425 6.05,0.625 ; 11.563,25.768 12.902,25.768 12.902,27.554 11.563,27.554 11.563,25.768 ; 11.586,5.432 12.925,5.432 12.925,7.218 11.586,7.218 11.586,5.432 ; 11.663,11.868 13.002,11.868 13.002,13.654 11.663,13.654 11.663,11.868 ; 11.7,18.9 13.039,18.9 13.039,20.686 11.7,20.686 11.7,18.9
  text "0" at 2.692,26.314 h0.89
  text "4" at 11.969,26.182 h0.89
  text "1" at 2.731,19.403 h0.89
  text "5" at 12.052,19.327 h0.89
  text "6" at 12.069,12.282 h0.89
  text "2" at 2.852,12.277 h0.89
  text "7" at 11.992,5.846 h0.89
  text "3" at 2.861,5.789 h0.89
  text "mag-finger" at 6.377,1.198 h0.89
Mechanical 1:
  the board outline again, w0.013